# EAGLE board Jetson_RTC-module (EAGLE 7.2.0)
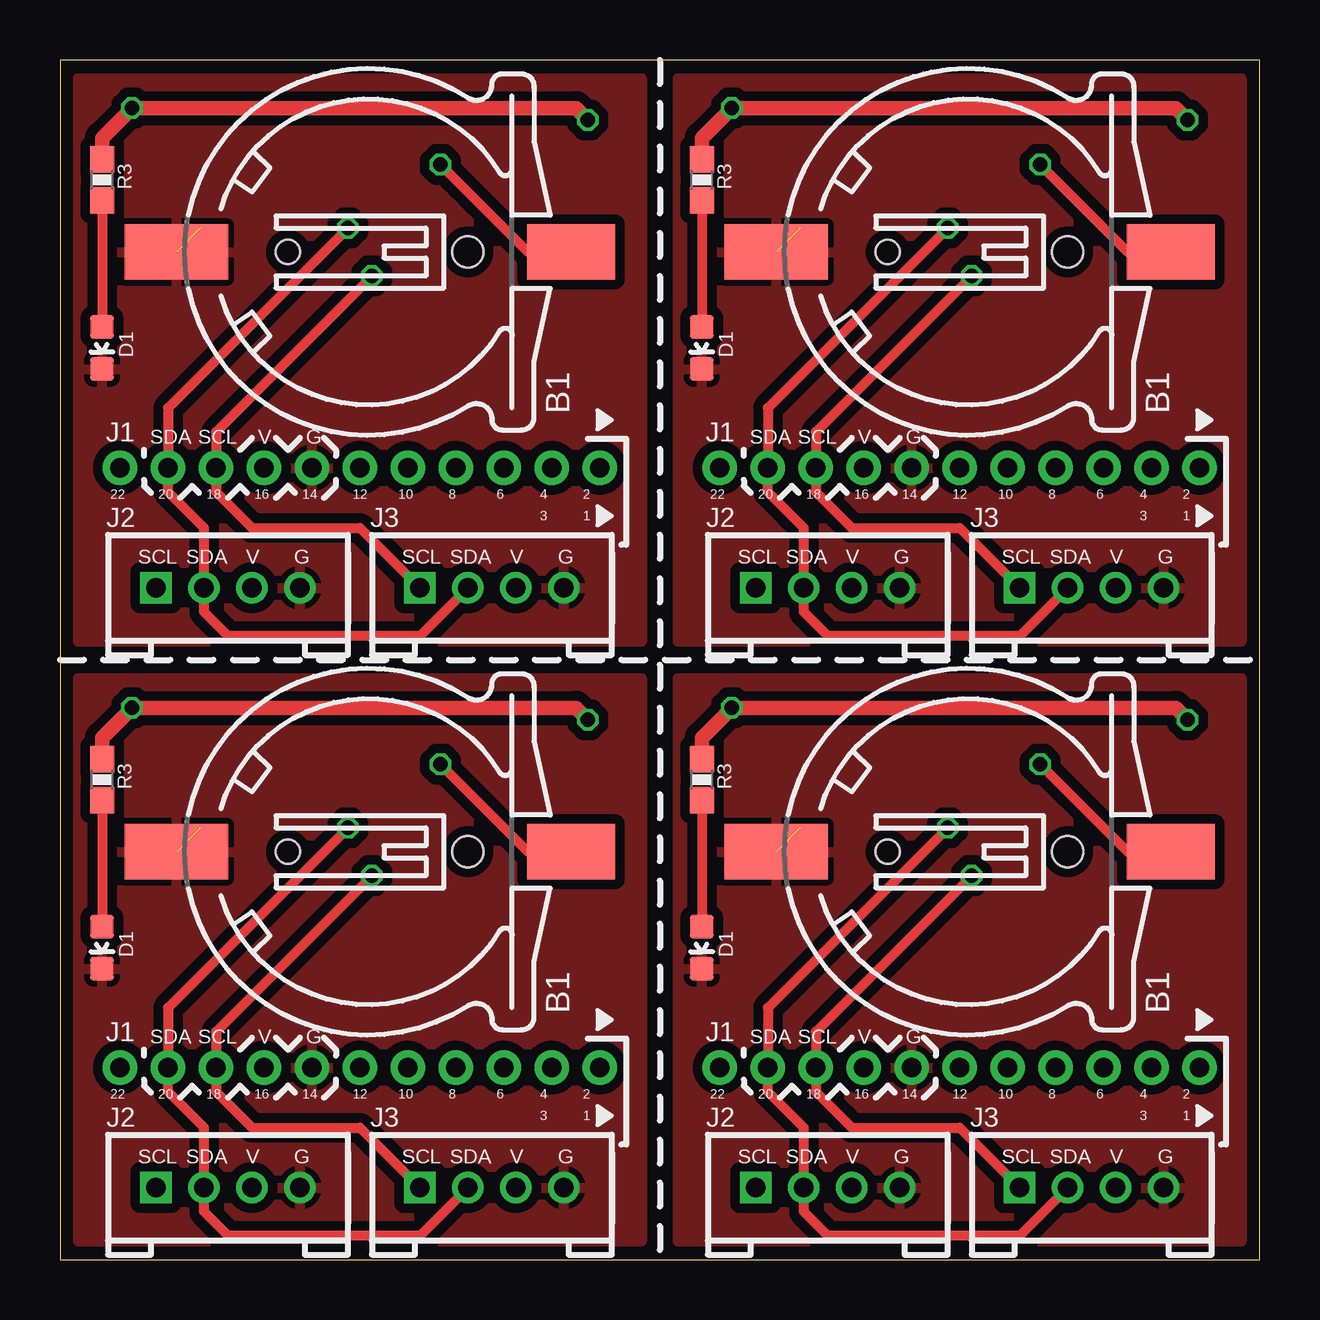
[diagram p0: board, top side]
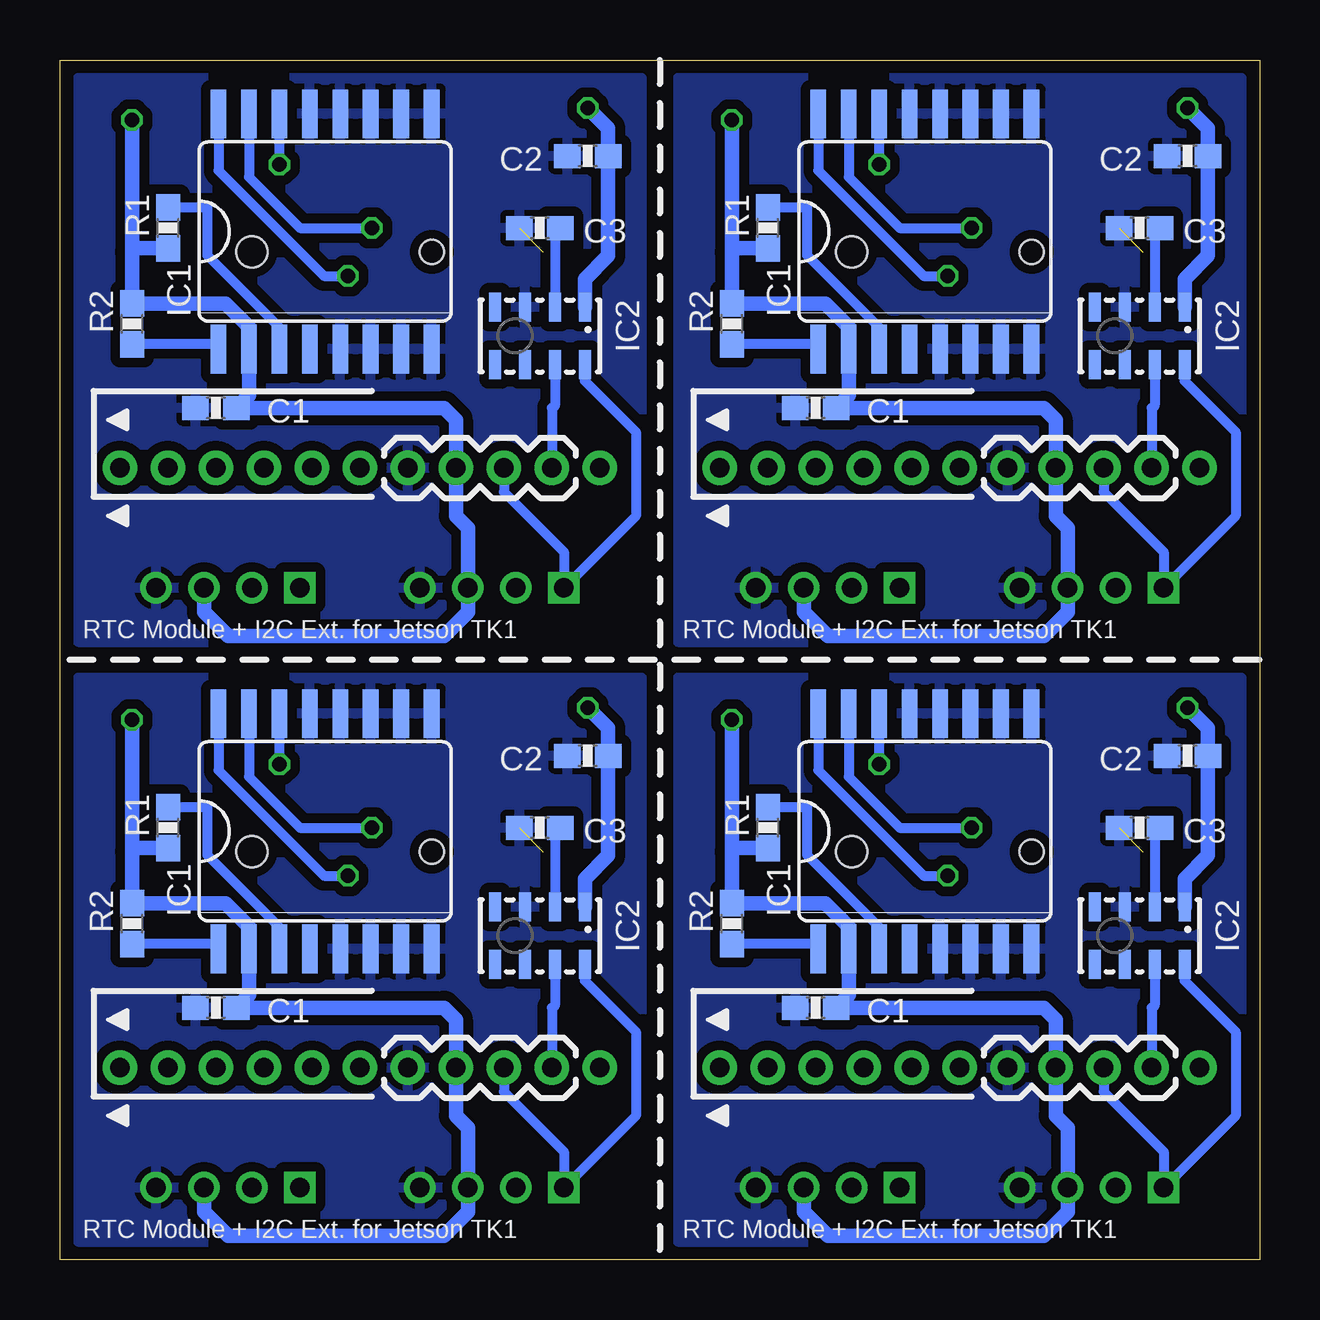
[diagram p1: board, bottom side, seen from below]

Size 50 x 50 mm. Coordinates in mm from the lower left corner, seen from the top.
Outline: 0,0 50,0 50,50 0,50 0,0
Copper layers (1*16): Top 0.035mm / dielectric 1.5mm / Bottom 0.035mm
Design rules "SeeedStudio_2layer_DRU_no_angle_20140221": minimum track width 6mil, minimum drill 12mil, track to track 6mil, track to pad 6mil, pad to pad 6mil, via to via 6mil, smd to smd 0mil, copper to edge 10mil, drill to drill 10mil, minimum pad ring 10mil, minimum via ring 6mil, stop-mask expansion 2mil, vias tented up to drill 100mil, thermal gap 10mil

## Footprints (pad centres in the part's own frame; a part is rotated, then mirrored left to right if it is on the bottom)
CH291-1220LF = smd 2.3 x 3.66: + 0,-2.296 | smd 2.3 x 4.3: - 0,14.146 | hole 1.3: 0,2 | hole 1: 0,9.5
C1608 = smd 1.1 x 1: 1 -0.85,0; 2 0.85,0
LED-0603 = smd 1 x 1: A 0,-0.877; C 0,0.877
SO16L = smd 0.66 x 2.032: 1 -4.445,-4.902; 2 -3.175,-4.902; 3 -1.905,-4.902; 4 -0.635,-4.902; 5 0.635,-4.902; 6 1.905,-4.902; 7 3.175,-4.902; 8 4.445,-4.902; 9 4.445,4.902; 10 3.175,4.902; 11 1.905,4.902; 12 0.635,4.902; 13 -0.635,4.902; 14 -1.905,4.902; 15 -3.175,4.902; 16 -4.445,4.902
LGA8 = smd 1.2 x 0.5: 1 -1.2,1.875; 2 -1.2,0.625; 3 -1.2,-0.625; 4 -1.2,-1.875; 5 1.2,-1.875; 6 1.2,-0.625; 7 1.2,0.625; 8 1.2,1.875
1X11 = drill 0.8 pad 1.422: 1 -10,0; 2 -8,0; 3 -6,0; 4 -4,0; 5 -2,0; 6 0,0; 7 2,0; 8 4,0; 9 6,0; 10 8,0; 11 10,0
4P-2.0 = drill 0.8 pad 1.27 square: 1 -3,0 | drill 0.8 pad 1.27: 2 -1,0; 3 1,0; 4 3,0
0603-RES = smd 1.1 x 1: 1 -0.85,0; 2 0.85,0

## Placement (x,y rotation side)
B1  CH291-1220LF  [CH291-1220LF]  19,17 90 top
B2  CH291-1220LF  [CH291-1220LF]  44,17 90 top
B3  CH291-1220LF  [CH291-1220LF]  19,42 90 top
B4  CH291-1220LF  [CH291-1220LF]  44,42 90 top
C1  0.1uF  [C1608]  18.5,10.5 180 bottom
C2  0.1uF  [C1608]  3,21 180 bottom
C3  1uF  [C1608]  5,18 180 bottom
C4  0.1uF  [C1608]  43.5,10.5 180 bottom
C5  0.1uF  [C1608]  28,21 180 bottom
C6  1uF  [C1608]  30,18 180 bottom
C7  0.1uF  [C1608]  18.5,35.5 180 bottom
C8  0.1uF  [C1608]  3,46 180 bottom
C9  1uF  [C1608]  5,43 180 bottom
C10  0.1uF  [C1608]  43.5,35.5 180 bottom
C11  0.1uF  [C1608]  28,46 180 bottom
C12  1uF  [C1608]  30,43 180 bottom
D1  GREEN  [LED-0603]  1.75,13 180 top
D2  GREEN  [LED-0603]  26.75,13 180 top
D3  GREEN  [LED-0603]  1.75,38 180 top
D4  GREEN  [LED-0603]  26.75,38 180 top
IC1  DS3231  [SO16L]  13.95,17.85 0 bottom
IC2  MPL115A  [LGA8]  5,13.5 270 bottom
IC3  DS3231  [SO16L]  38.95,17.85 0 bottom
IC4  MPL115A  [LGA8]  30,13.5 270 bottom
IC5  DS3231  [SO16L]  13.95,42.85 0 bottom
IC6  MPL115A  [LGA8]  5,38.5 270 bottom
IC7  DS3231  [SO16L]  38.95,42.85 0 bottom
IC8  MPL115A  [LGA8]  30,38.5 270 bottom
J1  1X11  [1X11]  12.5,8 0 bottom
J2  [4P-2.0]  7,3 0 top
J3  [4P-2.0]  18,3 0 top
J4  [4P-2.0]  32,3 0 top
J5  1X11  [1X11]  37.5,8 0 bottom
J6  [4P-2.0]  43,3 0 top
J7  [4P-2.0]  7,28 0 top
J8  1X11  [1X11]  12.5,33 0 bottom
J9  [4P-2.0]  18,28 0 top
J10  [4P-2.0]  32,28 0 top
J11  1X11  [1X11]  37.5,33 0 bottom
J12  [4P-2.0]  43,28 0 top
R1  [0603-RES]  20.5,18 270 bottom
R2  [0603-RES]  22,14 90 bottom
R3  [0603-RES]  1.75,20 90 top
R4  [0603-RES]  45.5,18 270 bottom
R5  [0603-RES]  47,14 90 bottom
R6  [0603-RES]  26.75,20 90 top
R7  [0603-RES]  20.5,43 270 bottom
R8  [0603-RES]  22,39 90 bottom
R9  [0603-RES]  1.75,45 90 top
R10  [0603-RES]  45.5,43 270 bottom
R11  [0603-RES]  47,39 90 bottom
R12  [0603-RES]  26.75,45 90 top

## Library data of the parts
B1-B4 = battery
C1-C12 = rcl
D1-D4 = SparkFun-LED; PROD_ID: DIO-00821
IC1 IC3 IC5 IC7 = DS3231
IC2 IC4 IC6 IC8 = SparkFun-Sensors
J1 J5 J8 J11 = headers(2mm)
J2-J4 J6 J7 J9 J10 J12 = Connector
R1-R12 = SparkFun-Resistors

## Nets
GND: B1.- C1.2 C2.2 C3.2 D1.C IC1.5 IC1.6 IC1.7 IC1.8 IC1.9 IC1.10 IC1.11 IC1.12 IC1.13 IC2.3 J1.7 J2.4 J3.4
GND1: B2.- C4.2 C5.2 C6.2 D2.C IC3.5 IC3.6 IC3.7 IC3.8 IC3.9 IC3.10 IC3.11 IC3.12 IC3.13 IC4.3 J4.4 J5.7 J6.4
GND2: B3.- C7.2 C8.2 C9.2 D3.C IC5.5 IC5.6 IC5.7 IC5.8 IC5.9 IC5.10 IC5.11 IC5.12 IC5.13 IC6.3 J7.4 J8.7 J9.4
GND3: B4.- C10.2 C11.2 C12.2 D4.C IC7.5 IC7.6 IC7.7 IC7.8 IC7.9 IC7.10 IC7.11 IC7.12 IC7.13 IC8.3 J10.4 J11.7 J12.4
N$1: B1.+ IC1.14
N$2: IC1.1 R2.1
N$3: IC1.3 R1.1
N$4: C3.1 IC2.2
N$6: D1.A R3.1
N$7: B2.+ IC3.14
N$8: IC3.1 R5.1
N$9: IC3.3 R4.1
N$10: C6.1 IC4.2
N$11: D2.A R6.1
N$12: B3.+ IC5.14
N$13: IC5.1 R8.1
N$14: IC5.3 R7.1
N$15: C9.1 IC6.2
N$16: D3.A R9.1
N$17: B4.+ IC7.14
N$18: IC7.1 R11.1
N$19: IC7.3 R10.1
N$20: C12.1 IC8.2
N$21: D4.A R12.1
SCL: IC1.16 IC2.8 J1.9 J2.1 J3.1
SCL1: IC3.16 IC4.8 J4.1 J5.9 J6.1
SCL2: IC5.16 IC6.8 J7.1 J8.9 J9.1
SCL3: IC7.16 IC8.8 J10.1 J11.9 J12.1
SDA: IC1.15 IC2.7 J1.10 J2.2 J3.2
SDA1: IC3.15 IC4.7 J4.2 J5.10 J6.2
SDA2: IC5.15 IC6.7 J7.2 J8.10 J9.2
SDA3: IC7.15 IC8.7 J10.2 J11.10 J12.2
VCC: C1.1 C2.1 IC1.2 IC2.1 J1.8 J2.3 J3.3 R1.2 R2.2 R3.2
VCC1: C4.1 C5.1 IC3.2 IC4.1 J4.3 J5.8 J6.3 R4.2 R5.2 R6.2
VCC2: C7.1 C8.1 IC5.2 IC6.1 J7.3 J8.8 J9.3 R7.2 R8.2 R9.2
VCC3: C10.1 C11.1 IC7.2 IC8.1 J10.3 J11.8 J12.3 R10.2 R11.2 R12.2

## Tracks (layer width: path | path; a pad name or v marks a point on that pad's centre or on a via)
GND  (1 unrouted)
  pour Bottom (isolate 0.406): 0.75,24.25 24.25,24.25 24.25,0.75 0.75,0.75
  pour Top (isolate 0.406): 0.75,24.25 24.25,24.25 24.25,0.75 0.75,0.75
GND1  (1 unrouted)
  pour Bottom (isolate 0.406): 25.75,24.25 49.25,24.25 49.25,0.75 25.75,0.75
  pour Top (isolate 0.406): 25.75,24.25 49.25,24.25 49.25,0.75 25.75,0.75
GND2  (1 unrouted)
  pour Bottom (isolate 0.406): 0.75,49.25 24.25,49.25 24.25,25.75 0.75,25.75
  pour Top (isolate 0.406): 0.75,49.25 24.25,49.25 24.25,25.75 0.75,25.75
GND3  (1 unrouted)
  pour Bottom (isolate 0.406): 25.75,49.25 49.25,49.25 49.25,25.75 25.75,25.75
  pour Top (isolate 0.406): 25.75,49.25 49.25,49.25 49.25,25.75 25.75,25.75
N$1  (via drill 0.6)
  Top 0.406: v15.86,20.64 19.5,17 B1.+
  Bottom 0.406: IC1.14 v15.86,20.64
N$2
  Bottom 0.406: IC1.1 18.6,13.15 R2.1
N$3
  Bottom 0.406: IC1.3 15.86,13.86 18.85,16.85 18.85,18.85 R1.1
N$4
  Bottom 0.406: C3.1 4.38,18 IC2.2
N$6
  Top 0.406: R3.1 D1.A
N$7  (via drill 0.6)
  Top 0.406: v40.85,20.64 44.5,17 B2.+
  Bottom 0.406: IC3.14 v40.85,20.64
N$8
  Bottom 0.406: IC3.1 43.6,13.15 R5.1
N$9
  Bottom 0.406: IC3.3 40.85,13.86 43.85,16.85 43.85,18.85 R4.1
N$10
  Bottom 0.406: C6.1 29.38,18 IC4.2
N$11
  Top 0.406: R6.1 D2.A
N$12  (via drill 0.6)
  Top 0.406: v15.86,45.65 19.5,42 B3.+
  Bottom 0.406: IC5.14 v15.86,45.65
N$13
  Bottom 0.406: IC5.1 18.6,38.15 R8.1
N$14
  Bottom 0.406: IC5.3 15.86,38.85 18.85,41.85 18.85,43.85 R7.1
N$15
  Bottom 0.406: C9.1 4.38,43 IC6.2
N$16
  Top 0.406: R9.1 D3.A
N$17  (via drill 0.6)
  Top 0.406: v40.85,45.65 44.5,42 B4.+
  Bottom 0.406: IC7.14 v40.85,45.65
N$18
  Bottom 0.406: IC7.1 43.6,38.15 R11.1
N$19
  Bottom 0.406: IC7.3 40.85,38.85 43.85,41.85 43.85,43.85 R10.1
N$20
  Bottom 0.406: C12.1 29.38,43 IC8.2
N$21
  Top 0.406: R12.1 D4.A
SCL  (via drill 0.6)
  Top 0.406: v13,16 6.5,9.5 J1.9 6.5,7 8,5.5 12.5,5.5 J3.1
  Bottom 0.406: IC1.16 18.39,20.39 14,16 v13,16 | IC2.8 3.12,11.62 1,9.5 1,6 J2.1 4,4.5 6.5,7 J1.9
SCL1  (via drill 0.6)
  Top 0.406: v38,16 31.5,9.5 J5.9 31.5,7 33,5.5 37.5,5.5 J6.1
  Bottom 0.406: IC3.16 43.4,20.39 39,16 v38,16 | IC4.8 28.12,11.62 26,9.5 26,6 J4.1 29,4.5 31.5,7 J5.9
SCL2  (via drill 0.6)
  Top 0.406: v13,41 6.5,34.5 J8.9 6.5,32 8,30.5 12.5,30.5 J9.1
  Bottom 0.406: IC5.16 18.39,45.4 14,41 v13,41 | IC6.8 3.12,36.62 1,34.5 1,31 J7.1 4,29.5 6.5,32 J8.9
SCL3  (via drill 0.6)
  Top 0.406: v38,41 31.5,34.5 J11.9 31.5,32 33,30.5 37.5,30.5 J12.1
  Bottom 0.406: IC7.16 43.4,45.4 39,41 v38,41 | IC8.8 28.12,36.62 26,34.5 26,31 J10.1 29,29.5 31.5,32 J11.9
SDA  (via drill 0.6)
  Top 0.406: J3.2 15,1 7,1 6,2 J2.2 6,5.5 4.5,7 J1.10 4.5,10.5 v12,18
  Bottom 0.406: IC1.15 17.12,20.12 15,18 v12,18 | IC2.7 4.38,10.62 arc90 4.5,10.5 J1.10
SDA1  (via drill 0.6)
  Top 0.406: J6.2 40,1 32,1 31,2 J4.2 31,5.5 29.5,7 J5.10 29.5,10.5 v37,18
  Bottom 0.406: IC3.15 42.12,20.12 40,18 v37,18 | IC4.7 29.38,10.62 arc90 29.5,10.5 J5.10
SDA2  (via drill 0.6)
  Top 0.406: J9.2 15,26 7,26 6,27 J7.2 6,30.5 4.5,32 J8.10 4.5,35.5 v12,43
  Bottom 0.406: IC5.15 17.12,45.12 15,43 v12,43 | IC6.7 4.38,35.62 arc90 4.5,35.5 J8.10
SDA3  (via drill 0.6)
  Top 0.406: J12.2 40,26 32,26 31,27 J10.2 31,30.5 29.5,32 J11.10 29.5,35.5 v37,43
  Bottom 0.406: IC7.15 42.12,45.12 40,43 v37,43 | IC8.7 29.38,35.62 arc90 29.5,35.5 J11.10
VCC  (via drill 0.6)
  Top 0.61: v22,22.5 21.5,23 v3,23 1.75,21.75 R3.2
  Bottom 0.406: 21.85,17.15 22,17 | 17.12,13.88 IC1.2
  Bottom 0.61: J3.3 19,2 18,1 9,1 8,2 J2.3 8,5.5 8.5,6 J1.8 8.5,10 9,10.5 C1.1 17.12,11.03 IC1.2 | v3,23 2.15,22.15 C2.1 2.15,16.85 3.12,15.88 IC2.1 | v22,22.5 22,17 R2.2 18.1,14.85 17.12,13.88 | R1.2 21.85,17.15
VCC1  (via drill 0.6)
  Top 0.61: v47,22.5 46.5,23 v28,23 26.75,21.75 R6.2
  Bottom 0.406: 46.85,17.15 47,17 | 42.12,13.88 IC3.2
  Bottom 0.61: J6.3 44,2 43,1 34,1 33,2 J4.3 33,5.5 33.5,6 J5.8 33.5,10 34,10.5 C4.1 42.12,11.03 IC3.2 | v28,23 27.15,22.15 C5.1 27.15,16.85 28.12,15.88 IC4.1 | v47,22.5 47,17 R5.2 43.1,14.85 42.12,13.88 | R4.2 46.85,17.15
VCC2  (via drill 0.6)
  Top 0.61: v22,47.5 21.5,48 v3,48 1.75,46.75 R9.2
  Bottom 0.406: 21.85,42.15 22,42 | 17.12,38.88 IC5.2
  Bottom 0.61: J9.3 19,27 18,26 9,26 8,27 J7.3 8,30.5 8.5,31 J8.8 8.5,35 9,35.5 C7.1 17.12,36.02 IC5.2 | v3,48 2.15,47.15 C8.1 2.15,41.85 3.12,40.88 IC6.1 | v22,47.5 22,42 R8.2 18.1,39.85 17.12,38.88 | R7.2 21.85,42.15
VCC3  (via drill 0.6)
  Top 0.61: v47,47.5 46.5,48 v28,48 26.75,46.75 R12.2
  Bottom 0.406: 46.85,42.15 47,42 | 42.12,38.88 IC7.2
  Bottom 0.61: J12.3 44,27 43,26 34,26 33,27 J10.3 33,30.5 33.5,31 J11.8 33.5,35 34,35.5 C10.1 42.12,36.02 IC7.2 | v28,48 27.15,47.15 C11.1 27.15,41.85 28.12,40.88 IC8.1 | v47,47.5 47,42 R11.2 43.1,39.85 42.12,38.88 | R10.2 46.85,42.15

## Text on the board
tPlace: J1 | J1 | 22 | 20 | 18 | 16 | 14 | 12 | 10 | 8 | 6 | 4 | 2 | 22 | 20 | 18 | 16 | 14 | 12 | 10 | 8 | 6 | 4 | 2 | 3 | 1 | 1 | 1 | 3 | 1 | 1 | 1 | J1 | J1 | 22 | 20 | 18 | 16 | 14 | 12 | 10 | 8 | 6 | 4 | 2 | 22 | 20 | 18 | 16 | 14 | 12 | 10 | 8 | 6 | 4 | 2 | 3 | 1 | 1 | 1 | 3 | 1 | 1 | 1
bPlace: RTC Module + I2C Ext. for Jetson TK1 | RTC Module + I2C Ext. for Jetson TK1 | RTC Module + I2C Ext. for Jetson TK1 | RTC Module + I2C Ext. for Jetson TK1
tNames: R3 | R3 | D1 | D1 | B1 | B1 | SDA | SCL | V | G | SDA | SCL | V | G | J2 | J3 | J2 | J3 | SCL | SDA | V | G | SCL | SDA | V | G | SCL | SDA | V | G | SCL | SDA | V | G | R3 | R3 | D1 | D1 | B1 | B1 | SDA | SCL | V | G | SDA | SCL | V | G | J2 | J3 | J2 | J3 | SCL | SDA | V | G | SCL | SDA | V | G | SCL | SDA | V | G | SCL | SDA | V | G
bNames: C2 | C2 | C3 | R1 | C3 | R1 | IC2 | IC2 | IC1 | R2 | IC1 | R2 | C1 | C1 | C2 | C2 | C3 | R1 | C3 | R1 | IC2 | IC2 | IC1 | R2 | IC1 | R2 | C1 | C1